# Altium PCB EE_smallOB_BW_v1.0.PcbDoc (part 4 of 4)
Units mil, origin at the board's own origin, x right, y up, seen from the top; angles counter-clockwise.
Board outline 1388 x 1586.96 mil, 4 copper layers (Top Layer, Layer 1, Layer 2, Bottom Layer), stack 37.371 mil thick; 116 components, 102 nets, 640 pads, 211 vias.
Unrouted connection lines stored in the file: 1.
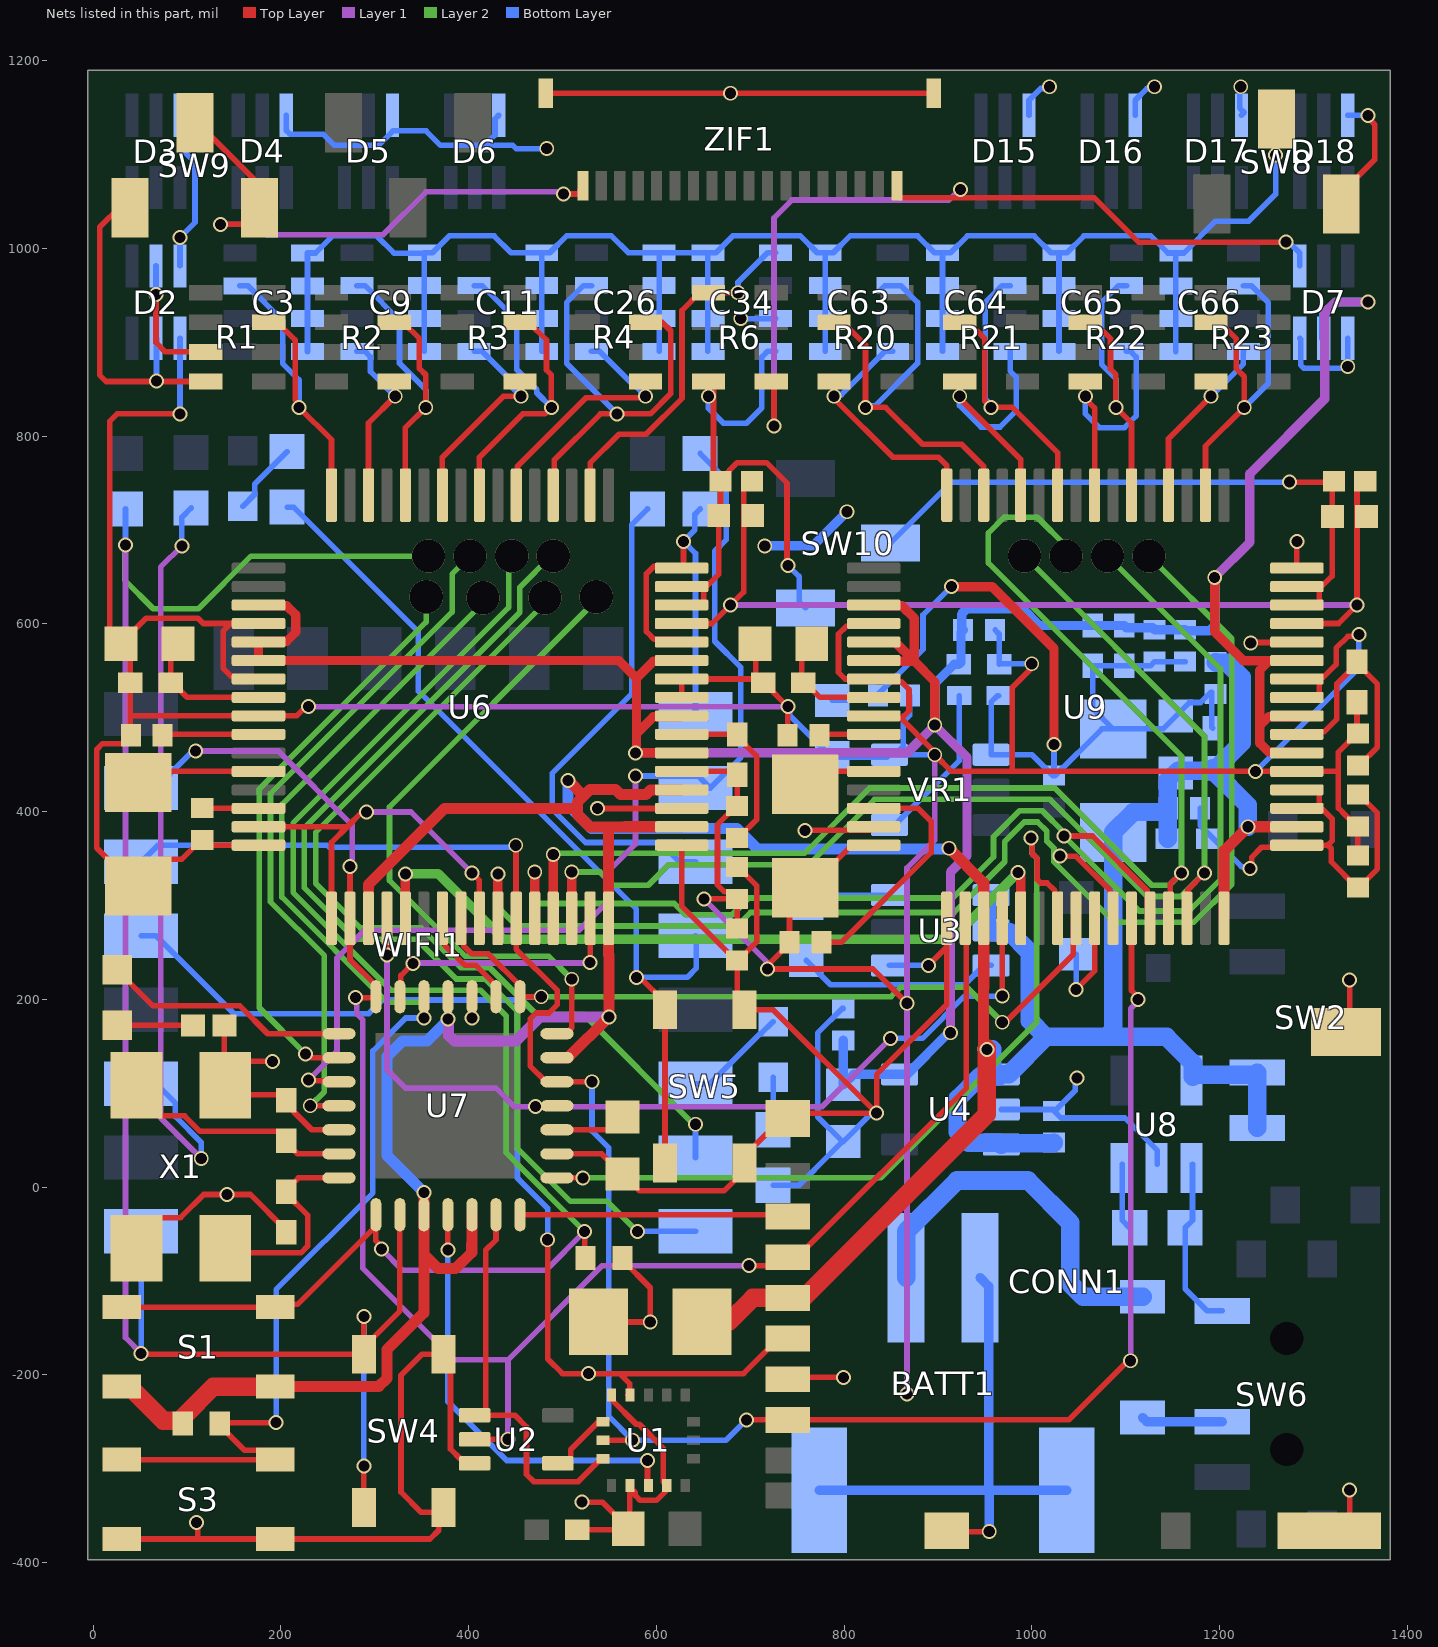
[diagram p4: the nets of this part, all layers, seen from the top]

## Via types
v1: diameter 15.87, hole 11.81, Top Layer to Bottom Layer, 188 vias
v2: diameter 35.43, hole 35.43, Top Layer to Bottom Layer, 14 vias
v3: diameter 19.68, hole 7.87, Top Layer to Bottom Layer, 9 vias

## Nets (pads, with @x,y where several pads share a name; then routed paths per layer and width w, separated by ;. In a path a pad name is that pad's centre, name@x,y a point inside that pad or via, vN(x,y) a via of type N, cw(c..) or ccw(c..) an arc to the next point about the centre after c; other vN are vias at no path point) (continued)
AGND: BATT1.1 BATT1.MP1 BATT1.MP2 C4.2 C8.2 C10.2 C12.2 C14.2 C18.2 C20.1 C21.2 C22.2 C23.1 C24.2 C25.2 C27.2 C28.2 C29.2 C30.1 C32.2 C33.1 C34.7 C35.2 C36.2 C37.2 C38.2 C41.2 C42.2 C43.2 C44.2 C58.2 C60.2 CONN1.6 CONN1.11 CONN1.12 CONN1.13 CONN1.14 D2.3 D3.3 D4.3 D5.3 D6.3 D7.1 D7.3 D15.3 D16.3 D17.3 D18.3 R8.2 R9.1 R14.1 R17.1 S3.3 S3.4 SW4.3 SW4.4 SW5.3 SW5.4 SW8.3 U1.5 U1.10 U1.12 U2.3 U3.1 U4.2 U6.31 U6.33 U6.41 U6.49 U6.51 U6.60 U6.64 U7.5 U7.16 U7.24 U8.2 U9.31 U9.33 U9.41 U9.49 U9.51 U9.52 U9.60 U9.64 VR1.1 WIFI1.15 X1.2 X1.4 ZIF1.MP1 ZIF1.MP2 | length 8393.5
  Top Layer w6: S3.3@30.51,-375 112.2,-375 ; X1.2@46.26,-64.96 46.26,-57.09 70.82,-32.53 93.11,-32.53 117.76,-7.87 v1(142.72,-7.87) 167.51,-7.87 205.71,-46.08 C23.1@205.71,-48.08 ; v1(110.24,-357.28) 111.43,-358.47 111.43,-374.22 112.2,-375 ; R8.2@139.76,172.24 139.76,109.25 X1.4@140.75,108.27 ; U6.31@176.18,383.86 270.67,383.86 ; v1(190.94,133.86) 165.31,133.86 140.75,109.3 X1.4@140.75,108.27 ; U6.33@253.94,286.42 253.94,367.13 270.67,383.86 ; U7.5@261.81,61.02 232.94,61.02 213.71,80.25 213.71,82.37 197.71,98.37 150.65,98.37 X1.4@140.75,108.27 ; v1(291.34,399.61) 286.42,399.61 270.67,383.86 ; v1(403.54,180.12) U7.24@403.54,202.76 ; v1(403.54,334.65) 411.42,326.77 U6.41@411.42,286.42 ; U2.3@406.5,-294.29 401.62,-289.42 391.03,-289.42 380.76,-279.15 380.76,-185.88 SW4.4@373.03,-178.15 350.39,-178.15 327.99,-200.55 327.99,-325.04 349.39,-346.43 368.13,-346.43 368.13,-365.56 358.69,-375 S3.4@193.9,-375 112.2,-375 ; ZIF1.MP1@482.28,1165.35 v1(679.13,1165.35) ZIF1.MP2@895.67,1165.35 ; U7.16@494.09,35.43 541.73,35.43 563.19,13.98 C25.2@563.98,13.98 582.03,-4.08 672.1,-4.08 693.9,17.72 SW5.3@693.9,25.59 693.9,33.46 716.58,56.15 720.52,56.15 743.11,78.74 v1(834.65,78.74) ; C10.2@515.6,-365.16 569.09,-365.16 569.09,-362.4 542.32,-335.63 v1(520.67,-335.63) ; v1(537.4,403.54) 537.68,403.27 626.69,403.27 U6.51@626.97,403.54 U6.51@629.87,400.64 ; C4.2@538.38,-143.7 v1(593.5,-143.7) 593.5,-107.28 563.98,-77.76 R9.1@563.98,-75.79 ; U1.5@552.17,-221.46 552.17,-226.31 578.6,-252.75 581.82,-252.75 607.49,-278.42 607.49,-314.18 U1.12@611.22,-317.91 609.3,-319.83 609.3,-324.69 600.19,-333.8 582.89,-333.8 577.61,-328.53 577.61,-325.65 U1.10@571.85,-319.88 ; C8.2@570.08,-364.17 571.85,-362.4 U1.10@571.85,-319.88 ; U1.10@571.85,-317.91 U1.10@571.85,-319.88 ; U6.60@626.97,580.71 624.06,583.61 597.71,583.61 589.42,591.9 589.42,653.4 597.44,661.42 625,661.42 U6.64@626.97,659.45 628.94,661.42 v1(628.94,687.99) ; U6.49@629.87,367.08 U6.49@626.97,364.17 626.97,299.45 684.84,241.57 C18.2@686.02,241.57 ; C21.2@687.2,340.83 706.83,321.2 706.83,261.2 687.2,241.57 C18.2@686.02,241.57 ; CONN1.11@723.47,56.15 CONN1.11@740.16,72.83 ; CONN1.6@740.16,-204.72 742.13,-202.76 v1(799.21,-202.76) ; v1@753.86,380 v1(758.19,380) 827.84,380 U9.31@831.69,383.86 ; v1(889.76,236.22) 909.45,255.91 ; CONN1.14@909.45,-366.14 910.43,-367.13 v1(954.72,-367.13) ; U9.33@909.45,286.42 909.45,255.91 ; v1(1047.24,210.63) 1066.93,230.31 U9.41@1066.93,286.42 ; v1(1232.28,339.57) 1234.17,341.46 1234.17,351.3 1244.94,362.06 1280.37,362.06 U9.49@1282.48,364.17 1315.38,364.17 ; v1(1233.27,579.72) 1233.76,580.22 1281.99,580.22 U9.60@1282.48,580.71 ; U9.52@1282.48,423.23 1303.17,423.23 1306.08,420.32 1306.08,406.3 1320.02,392.35 1320.02,368.81 1315.38,364.17 ; U9.64@1282.48,659.45 v1(1282.48,687.99) ; CONN1.13@1316.93,-366.14 1321.9,-366.14 1338.58,-349.46 v1(1338.58,-322.83) ; SW8.3@1329.72,1047.24 1329.72,1059.06 1365.36,1094.69 1365.36,1131.97 1358.27,1139.06 v1(1358.27,1141.73) ; CONN1.12@1334.65,165.35 1338.58,169.29 v1(1338.58,220.47) ; C60.2@1347.44,418.03 1348.62,418.03 1368.25,398.4 1368.25,338.96 1348.62,319.33 1346.26,319.33 1318.9,346.69 1318.9,360.66 1315.38,364.17 ; C18.2@686.02,241.57 686.02,196.85 SW5.4@693.9,188.98 724.41,188.98 v1(834.65,78.74) ; v1(834.65,78.74) 834.65,119.75 909.45,194.55 909.45,255.91
  Top Layer w10: v1(914.37,639.76) 957.68,639.76 1023.62,573.82 v1(1023.62,471.46)
  Layer 1 w6: v1(291.34,399.61) 338.58,399.61 v1(403.54,334.65)
  Bottom Layer w6: D2.3@92.52,981.41 v1(92.52,1011.81) 108.52,1027.81 108.52,1091.57 92.52,1107.57 D3.3@92.52,1141.85 ; D4.3@205.71,1141.85 205.71,1125.85 209.71,1121.85 244.99,1121.85 256.99,1109.85 304.04,1109.85 309.31,1115.12 319.47,1125.28 354.75,1125.28 370.18,1109.85 417.22,1109.85 ; D6.3@432.09,1141.85 428.09,1137.85 428.09,1120.71 417.22,1109.85 ; v1(483.27,1106.3) 450.68,1106.3 447.14,1109.85 417.22,1109.85 ; WIFI1.15@641.73,503.94 641.73,675.2 v1(628.94,687.99) 640.91,699.97 640.91,716.7 R17.1@646.65,722.44 ; v1(689.96,925.2) 726.73,925.2 C34.7@726.94,925.41 ; R14.1@724.41,1.97 752.11,1.97 768.01,17.87 768.01,18.01 798.42,48.43 771.9,74.95 771.9,164.11 798.03,190.24 C35.2@799.21,190.24 ; C29.2@787.4,518.5 830.94,518.5 830.94,519.68 884.17,572.91 884.17,609.57 v1(914.37,639.76) ; C37.2@799.21,48.43 829.53,78.74 v1(834.65,78.74) ; U3.1@848.43,236.22 v1(889.76,236.22) ; 952,-322.83 954.72,-325.56 ; C30.1@964.57,523.62 963.69,523.62 956.69,516.62 VR1.1@956.69,460.63 1000.08,460.63 1022.44,438.27 C36.2@1023.62,438.27 ; U4.2@967.52,82.68 1022.2,82.68 C38.2@1023.62,81.26 ; D15.3@997.05,1141.85 997.05,1157.85 1009.61,1170.41 1016.86,1170.41 v1(1018.75,1172.3) ; v1(1023.62,471.46) C36.2@1023.62,438.27 ; v1(1047.24,210.63) C33.1@1047.24,248.03 ; v1(1048.23,116.14) 1046.34,114.25 1046.34,102.8 1024.8,81.26 C38.2@1023.62,81.26 ; D16.3@1110.24,1141.85 1110.24,1157.85 1122.74,1170.35 1129.02,1170.35 v1(1130.91,1172.24) ; U8.2@1133.86,24.21 1133.86,38.98 1099.2,73.63 1031.25,73.63 C38.2@1023.62,81.26 ; C27.2@1163.39,559.76 C22.2@1130.91,559.76 1126.41,555.27 C24.2@1098.43,555.27 C28.2@1064.96,555.27 1064.96,509.84 C44.2@1086.61,488.19 ; C42.2@1179.41,403.54 1179.41,385.43 1223.38,341.46 1230.39,341.46 v1(1232.28,339.57) ; C12.2@1192.91,489.02 1191.93,490 1191.93,527.28 1190.75,527.28 1179.76,516.29 1168.06,516.29 1139.96,488.19 C44.2@1086.61,488.19 ; v1@1221.46,1170.28 1221.46,1149.72 1226.38,1144.8 D17.3@1223.43,1141.85 ; D7.3@1285.43,904.41 1286.42,903.43 1286.42,875.93 1289.93,872.41 1335.01,872.41 v1(1336.61,874.02) D7.1@1336.61,904.41 ; D18.3@1336.61,1141.85 1336.73,1141.73 v1(1358.27,1141.73) ; C36.2@1023.62,438.27 1024.8,438.27 1074.72,488.19 C44.2@1086.61,488.19
  Bottom Layer w10: v1(715.55,683.07) 766.73,683.07 v1(803.15,719.49) ; BATT1.MP2@773.62,-322.83 952,-322.83 BATT1.MP1@1037.4,-322.83 ; BATT1.1@944.88,-96.46 954,-105.57 954,-322.83 ; v1(954.72,-367.13) 954.72,-325.56
  other v1: 1222.64,1172.24
AVDD: C13.1 C17.1 C22.1 C24.1 C27.1 C28.1 C35.1 C37.1 D7.2 U4.5 U6.19 U6.21 U6.22 U6.54 U6.56 U6.59 U9.19 U9.21 U9.22 U9.54 U9.56 U9.59 | length 3181.7
  Top Layer w10: U6.19@176.18,620.08 177.09,619.17 206.27,619.17 215.73,609.71 215.73,591.07 206.26,581.61 177.09,581.61 U6.21@176.18,580.71 U6.22@176.18,561.02 559.97,561.02 578.88,542.11 ; U6.54@626.97,462.6 v1(577.76,462.6) 578.88,463.72 578.88,483.06 ; U6.56@626.97,501.97 626.06,501.06 596.88,501.06 578.88,483.06 ; U6.59@626.97,561.02 626.06,560.12 596.88,560.12 578.88,542.11 ; U9.22@831.69,561.02 832.6,560.12 874.92,560.12 ; U9.21@831.69,580.71 854.33,580.71 874.92,560.12 ; U9.19@831.69,620.08 832.6,619.17 861.78,619.17 874.92,606.03 874.92,560.12 ; v1(896.65,492.13) 896.65,538.38 874.92,560.12 ; v1(1194.88,649.61) 1194.88,591.33 1225.42,560.79 1253.07,560.79 ; U9.54@1282.48,462.6 1281.58,463.5 1252.4,463.5 1242.94,472.96 1242.94,491.6 ; U9.56@1282.48,501.97 1281.58,501.06 1252.4,501.06 1242.94,491.6 ; U9.59@1287.34,560.79 1253.07,560.79 ; 578.88,483.06 578.88,542.11 ; 1242.94,491.6 1242.94,550.66 1253.07,560.79
  Layer 1 w10: v1(577.76,462.6) 867.13,462.6 v1(896.65,492.13) 930.94,457.84 930.94,353.16 913.39,335.6 v1(913.39,164.37) ; v1(1194.88,649.61) 1232.35,687.08 1232.35,759.91 1312.01,839.57 1312.01,931.1 1323.82,942.91 v1(1358.27,942.91)
  Bottom Layer w10: C35.1@799.21,156.22 C37.1@799.21,109.06 810.23,120.08 U4.5@859.25,120.08 867.13,120.08 910.29,163.25 912.26,163.25 v1(913.39,164.37) ; v1(896.65,492.13) 896.65,536.26 917.48,557.09 C13.1@922.4,557.09 924.64,559.33 924.64,591.26 C17.1@926.89,593.5 925.2,595.2 925.2,610.46 931.05,616.31 989.99,616.31 1008.03,598.27 C28.1@1064.96,598.27 C24.1@1098.43,598.27 1100.67,596.03 1128.66,596.03 C22.1@1130.91,593.78 C27.1@1163.39,593.78 1164.38,592.78 1189.02,592.78 1194.88,598.64 v1(1194.88,649.61) ; D7.2@1311.02,904.41 1311.02,930.12 1323.82,942.91 v1(1358.27,942.91)
AVSS: C1.2 C2.2 C5.2 C6.2 C7.2 C13.2 C15.1 C17.2 C18.1 C19.1 C21.1 C29.1 C32.1 C45.2 C46.2 C47.2 C51.1 C54.2 C55.2 C58.1 C59.1 C60.1 D2.4 U6.20 U6.23 U6.25 U6.32 U6.53 U6.57 U6.58 U9.20 U9.23 U9.25 U9.32 U9.53 U9.57 U9.58 VR1.5 | length 5087.5
  Top Layer w6: v1(92.52,823.82) 25.59,823.82 17.51,815.74 17.51,590.95 C1.2@29.72,578.74 ; U6.32@176.18,364.17 121.77,364.17 C7.2@116.14,369.8 114.96,369.8 94.52,349.36 76.72,349.36 C2.2@48.23,320.87 44.29,320.87 3.8,361.36 3.8,466.33 9.96,472.49 32.45,472.49 40.08,480.12 C6.2@40.08,481.3 39.52,481.86 39.52,501.97 ; U6.23@176.18,541.34 173.28,544.24 146.93,544.24 138.64,552.53 138.64,592.31 146.72,600.39 117.25,600.39 111.6,606.05 56.24,606.05 29.72,579.53 C1.2@29.72,578.74 ; v1(229.36,511.84) 226.68,511.84 216.82,501.97 U6.25@176.18,501.97 176.04,502.11 45.42,502.11 45.28,501.97 39.52,501.97 ; U6.58@609.44,541.34 U6.58@624.06,541.34 ; U6.53@626.97,442.91 682.24,442.91 C15.1@686.02,439.13 C19.1@686.02,405.79 684.84,405.79 665.21,386.16 665.21,321.99 672.76,314.44 678.39,314.44 C21.1@685.75,307.09 ; U6.57@626.97,521.65 626.97,538.43 U6.58@624.06,541.34 ; v1(650.59,307.09) C21.1@685.75,307.09 ; C18.1@686.02,275.59 C21.1@686.02,306.81 C21.1@685.75,307.09 ; C46.2@704.92,578.74 705.74,577.93 705.74,545.4 C47.2@709.8,541.34 ; C47.2@717.52,533.62 C47.2@713.74,537.4 C47.2@709.8,541.34 ; C47.2@717.94,534.03 739.88,512.09 C54.2@739.88,481.3 ; U9.32@831.69,364.17 828.79,361.27 805.17,361.27 762.79,318.9 C45.2@758.86,318.9 741.85,301.89 741.85,259.65 720.39,238.19 720.39,234.17 v1(718.5,232.28) 830.71,232.28 v1(867.13,195.87) ; U9.20@831.69,600.39 828.79,597.49 802.44,597.49 794.15,589.2 794.15,548.37 801.18,541.34 U9.23@831.69,541.34 834.6,538.43 860.95,538.43 869.24,530.15 869.24,507.35 860.95,499.06 894.76,465.25 894.76,462.52 v1(896.65,460.63) 914.37,442.91 979.33,442.91 ; v1(1000,557.58) 1000,553.15 979.33,532.48 979.33,442.91 ; U9.57@1282.48,521.65 1303.17,521.65 1306.08,524.56 1306.08,538.58 1324.27,556.78 1324.27,574.15 1336.81,586.69 1346.54,586.69 v1(1348.43,588.58) ; 1333.93,396.35 1346.26,384.02 C60.1@1347.44,384.02 C58.1@1347.44,353.35 ; 1333.93,396.38 1326.63,403.67 1326.63,442.91 ; C51.1@1346.46,516.61 1346.46,483.98 C59.1@1347.44,482.99 1346.26,482.99 1326.63,463.36 1326.63,442.91 ; C1.2@29.72,578.74 39.52,568.94 C5.2@39.52,537.4 39.52,501.97 ; U6.58@624.06,541.34 U6.58@626.97,541.34 C47.2@709.8,541.34 ; 979.33,442.91 U9.53@1282.48,442.91 1326.63,442.91
  Layer 1 w6: v1(229.36,511.84) v1(740.19,511.84) ; v1(650.59,307.09) 718.5,239.17 v1(718.5,232.28) ; v1(867.13,-220.47) v1(867.13,195.87) 867.13,340.08 896.65,369.61 v1(896.65,460.63)
  Bottom Layer w6: v1(92.52,823.82) D2.4@92.52,904.41 ; v1(740.19,511.84) 742.08,509.95 742.08,502.41 786.61,457.87 C29.1@787.4,457.87 845.67,457.87 VR1.5@848.43,460.63 v1(896.65,460.63) ; VR1.5@854.29,460.63 863.1,469.44 863.1,495.83 870.08,502.81 C32.1@870.08,523.62 ; C17.2@960.9,593.5 965.4,589.01 C13.2@965.4,557.09 965.89,557.58 v1(1000,557.58) ; v1(1238.19,442.91) 1348.43,553.15 v1(1348.43,588.58)
BIAS: D7.4 R6.1 ZIF1.18 | length 962.7
  Top Layer w6: R6.1@722.44,858.27 725.39,855.31 v1(725.39,811.02) ; ZIF1.18@856.3,1066.93 856.3,1057.09 859.21,1054.18 924.21,1054.18 ; v1(924.21,1062.99) 924.21,1054.18 ; v1@1264.86,1006.75 1113.81,1006.75 1066.37,1054.18 924.21,1054.18
  Layer 1 w6: v1(725.39,811.02) 725.39,1032.48 744.51,1051.6 911.65,1051.6 923.05,1062.99 v1(924.21,1062.99)
  Bottom Layer w6: v1(1270.67,1006.89) 1273.56,1006.89 1285.43,995.02 D7.4@1285.43,981.41
BIAS_DRV: C16.1 C34.8 R5.1 R6.8 SW10.1 U6.62 U6.63 | length 663.1
  Top Layer w6: U6.62@626.97,620.08 647.66,620.08 650.56,622.98 650.56,637.01 666.34,652.78 C16.1@666.34,721.46 ; R6.8@655.51,858.27 660.88,852.9 660.88,759.4 R5.1@668.31,751.97 ; C16.1@666.54,715.55 668.31,717.32 R5.1@668.31,751.97 ; v1(740.16,662.4) 739.17,663.39 739.17,749.93 717.31,771.8 686.23,771.8 668.31,753.87 R5.1@668.31,751.97
  Bottom Layer w6: v1(655.51,842.52) 655.51,829.72 671.46,813.77 695.99,813.77 712.44,830.22 712.44,884.41 718.44,890.41 C34.8@726.94,890.41 ; v1(740.16,662.4) 752.13,650.43 752.13,623.85 SW10.1@758.86,617.13
BIAS_INV: C16.2 C53.2 R5.2 R25.2 U6.61 U9.61 | length 1077.8
  Top Layer w6: U6.61@626.97,600.39 659.45,600.39 v1(679.13,620.08) 692.96,633.9 692.96,744.14 700.79,751.97 R5.2@701.77,751.97 ; U9.61@1282.48,600.39 1326.77,600.39 v1(1346.46,620.08) v1(1346.46,620.08) 1346.5,744.14 1354.33,751.97 R25.2@1355.31,751.97
  Layer 1 w6: v1(679.13,620.08) v1(1346.46,620.08)
BOOT_EN: R9.2 S1.1 S1.2 U7.8 | length 1617.9
  Top Layer w6: S1.1@30.51,-127.95 S1.2@193.9,-127.95 196.85,-125 217.52,-125 U7.8@301.18,-41.34 ; U7.8@301.18,-29.53 U7.8@301.18,-41.34 ; v1(307.09,-65.94) 307.09,-63.27 301.18,-57.37 U7.8@301.18,-41.34 ; v1(523.62,-47.24) 523.62,-74.8 R9.2@524.61,-75.79
  Layer 1 w6: v1(307.09,-65.94) 329.72,-88.58 482.28,-88.58 v1(523.62,-47.24)
  Layer 2 w6: v2(445.87,672.24) 442.58,668.96 442.58,617.41 213,387.83 213,313.81 317.17,209.65 412.58,209.65 440.1,182.12 440.1,36.28 v1(523.62,-47.24)
CLK: U6.37 U9.37 | length 808
  Top Layer w10: U6.37@332.68,286.42 v1(332.68,333.66) ; v1(985.33,335.1) 985.33,333.51 988.19,330.65 U9.37@988.19,286.42
  Layer 2 w10: v1(332.68,333.66) 367.79,333.66 437.36,264.09 914.32,264.09 v1(985.33,335.1)
CS1: U6.39 U7.23 | length 114.1
  Top Layer w6: U6.39@372.05,286.42 374.95,283.51 374.95,257.16 395.69,236.42 407.28,236.42 429.13,214.57 U7.23@429.13,202.76
CS2: U7.15 U9.39 | length 880.2
  Top Layer w6: U7.15@494.09,9.84 v1(521.65,9.84) ; v1(999.02,372.05) 1000.54,370.53 1000.54,355.11 1005.91,349.74 1005.91,327.48 1009.42,323.96 1016.37,323.96 1024.65,315.67 1024.65,289.32 U9.39@1027.56,286.42
  Layer 2 w6: v1(521.65,9.84) 839.41,9.84 1005.13,175.56 1005.13,350.52 1000.54,355.11 1000.54,370.53 v1(999.02,372.05)
CS3: CONN1.2 U7.14 | length 286.2
  Top Layer w6: U7.14@454.72,-29.53 738.19,-29.53 CONN1.2@740.16,-31.5
CS4: U1.8 U2.1 U7.13 | length 426.1
  Top Layer w6: U2.1@406.5,-243.11 U2.1@413.39,-243.11 ; U7.13@429.13,-29.53 429.13,-56.24 418.26,-67.12 418.26,-238.24 U2.1@413.39,-243.11 ; U1.8@543.31,-289.37 541.34,-289.37 516.73,-313.98 469.49,-313.98 461.61,-306.1 461.61,-255.48 449.24,-243.11 U2.1@413.39,-243.11
D13: R17.2 U7.3 WIFI1.16 | length 1118.1
  Top Layer w6: v1(229.34,114.18) 230.33,113.19 260.82,113.19 U7.3@261.81,112.2
  Layer 1 w6: v1(229.34,114.18) 259.8,144.65 259.8,244.05 289.37,273.62 517.72,273.62 546.79,302.7 546.79,334.52 577.76,365.49 v1(577.78,438.01)
  Bottom Layer w6: v1(577.78,438.01) 644.66,438.01 657.48,425.2 690.1,457.82 690.1,553.63 662.2,581.54 662.2,677.35 674.35,689.51 674.35,753.79 R17.2@646.65,781.5
D18: R12.1 SW4.1 SW4.2 U7.9 WIFI1.1 | length 2080.2
  Top Layer w6: v1(51.18,-177.17) 52.17,-178.15 SW4.2@288.39,-178.15 ; SW4.1@288.39,-341.54 v1(288.39,-297.24) ; v1(288.39,-137.8) SW4.2@288.39,-178.15 ; U7.9@326.77,-29.53 326.77,-131.89 288.39,-170.28 SW4.2@288.39,-178.15
  Layer 1 w6: v1(34.45,684.06) 34.45,-160.43 v1(51.18,-177.17)
  Layer 2 w6: v1(34.45,684.06) 33.46,683.07 33.46,646.65 63.98,616.14 112.2,616.14 168.31,672.24 v2(357.28,672.24)
  Bottom Layer w6: v1(34.45,684.06) R12.1@34.45,722.44 ; v1(51.18,-177.17) WIFI1.1@51.18,-47.24 ; v1(288.39,-297.24) v1(288.39,-137.8)
DRDY: U6.47 U7.27 | length 277.8
  Top Layer w6: U7.27@326.77,202.76 327.88,203.87 327.88,225.52 v1(340.55,238.19) ; v1(529.53,239.17) U6.47@529.53,286.42
  Layer 1 w6: v1(340.55,238.19) 341.04,238.68 529.04,238.68 v1(529.53,239.17)
DRL_SET: C53.1 R25.1 SW10.2 U9.62 U9.63 | length 658.7
  Top Layer w6: v1(1274.61,750.98) R25.1@1320.87,750.98 ; U9.62@1282.48,620.08 1303.17,620.08 1306.08,622.98 1306.08,637.01 1320.02,650.96 1320.02,750.14 R25.1@1320.87,750.98 ; R25.1@1321.85,751.97 R25.1@1320.87,750.98
  Bottom Layer w6: SW10.2@849.41,686.02 914.37,750.98 v1(1274.61,750.98)
DVDD: C4.1 C12.1 C14.1 C38.1 C41.1 C42.1 C43.1 C44.1 CONN1.4 R7.2 S1.3 S1.4 SW2.3 SW2.4 U3.4 U3.5 U4.1 U4.3 U6.35 U6.48 U6.50 U6.52 U7.10 U7.12 U7.20 U7.25 U8.5 U9.35 U9.48 U9.50 | length 4670.7
  Top Layer w11.81: S1.4@193.9,-212.6 304.24,-212.6 313.09,-203.75 313.09,-173.13 352.36,-133.86 352.36,-87.6 U7.10@352.36,-29.53 ; U6.35@293.31,286.42 293.31,322.35 374.5,403.54 516.07,403.54 ; v1(352.36,-5.91) 352.36,-71.85 367.28,-86.77 386.17,-86.77 403.35,-69.59 403.35,-60.95 403.54,-60.76 U7.12@403.54,-29.53 ; U7.20@494.09,137.8 505.91,137.8 v1(549.37,181.26) 549.37,247.39 549.21,247.55 549.21,382.42 547.93,383.7 ; v1(505.91,433.07) 506.38,433.07 522.63,416.83 ; U6.50@626.97,383.86 566.84,383.86 566.68,383.7 547.93,383.7 ; U6.52@626.97,423.23 594.01,423.23 588.95,418.17 561.67,418.17 556.46,423.39 529.18,423.39 522.63,416.83 ; v1(912,361) 948.82,324.18 U9.35@948.82,286.42 948.82,212.12 948.66,211.96 948.66,151.36 v1@952.26,147.75 ; U9.48@1204.72,286.42 1204.72,358.27 v1(1230.32,383.86) U9.50@1282.48,383.86 ; 516.07,403.54 516.07,410.27 522.63,416.83 ; 516.07,403.54 516.07,396.82 529.18,383.7 547.93,383.7
  Top Layer w19.68: S1.3@30.51,-212.6 38.39,-212.6 74.8,-249.01 94.49,-249.01 95.47,-250 R7.2@95.47,-251.97 96.46,-250.98 96.46,-244.33 128.19,-212.6 S1.4@193.9,-212.6 ; C4.1@677.26,-143.7 702.85,-118.11 CONN1.4@740.16,-118.11 756.66,-118.11 952.26,77.5 v1(952.26,146.65) v1@952.26,147.75
  Layer 1 w11.81: v1(377.95,179.13) 378.73,178.36 378.73,161.65 384.87,155.51 450.24,155.51 475.99,181.26 v1(549.37,181.26)
  Bottom Layer w10: U3.5@956.69,273.62 U3.4@956.69,311.02
  Bottom Layer w11.81: v1(352.36,-5.91) 312.9,33.56 312.9,138.93 329.38,155.41 355.72,155.41 377.18,176.87 377.18,178.36 v1(377.95,179.13) ; v1(505.91,433.07) 505.91,406.98 530.9,381.98 686.03,381.98 707.86,360.16 911.16,360.16 v1(912,361)
  Bottom Layer w19.68: v1(952.26,146.65) 957.68,146.65 957.68,122.05 959.65,120.08 U4.1@967.52,120.08 ; U3.5@956.69,273.62 958.66,271.65 976.38,271.65 997.78,250.25 997.78,177.41 1015.25,159.94 ; C38.1@1023.62,47.24 1022.83,46.46 968.7,46.46 U4.3@967.52,45.28 965.55,47.24 932.79,47.24 921.26,58.78 921.26,94.49 944.88,118.11 965.55,118.11 U4.1@967.52,120.08 ; 1079.43,159.94 1086.61,167.12 C44.1@1086.61,377.95 1108.27,399.61 C42.1@1142.64,399.61 ; C41.1@1144.84,371.06 1144.84,397.41 C42.1@1142.64,399.61 ; C43.1@1145.08,433.46 1145.08,402.05 C42.1@1142.64,399.61 ; C43.1@1153.54,441.14 1155.98,443.58 1191.76,443.58 C12.1@1192.91,444.74 ; U8.5@1171.26,117.52 U8.5@1171.26,117.81 ; C14.1@1195.87,559.33 1196.65,558.54 1208.19,558.54 1223.52,543.21 1223.52,473.22 1196.32,446.02 C12.1@1192.91,446.02 C12.1@1192.91,444.74 ; v1(1230.32,383.86) 1230.32,406.62 1192.91,444.02 C12.1@1192.91,444.74 ; SW2.4@1240.16,62.99 SW2.3@1240.16,122.05 1237.89,119.78 1173.23,119.78 U8.5@1171.26,117.81 ; U4.1@967.52,120.08 975.39,120.08 1015.25,159.94 ; 1015.25,159.94 1143.61,159.94 1171.26,132.28 U8.5@1171.26,117.81
GPIO1: U6.42 U9.42 | length 1499.4
  Top Layer w6: v1(1030.07,352.61) 1030.32,352.37 1047.01,352.37 1083.71,315.67 1083.71,289.32 U9.42@1086.61,286.42
  Top Layer w10: U6.42@431.1,286.42 v1(431.1,333.66)
  Layer 2 w6: v1(431.1,333.66) 431.1,298.23 451.24,278.09 685.82,278.09 700.28,292.54 917.22,292.54 971.25,346.58 971.25,368.24 992,388.98 1006.25,388.98 1015.95,379.28 1015.95,368.63 1023.62,360.96 v1@1023.62,352.61 ; v1(1030.07,352.61) v1@1023.62,352.61 ; v2(1125,672.24) 1213.06,584.19 1213.06,322.63 1172.43,282.01 1088.07,282.01 1023.62,346.46 v1@1023.62,352.61
GPIO2: U6.44 U9.44 | length 1472.6
  Top Layer w6: v1(1034.5,374.03) 1064.74,374.02 1123.08,315.67 1123.08,289.32 U9.44@1125.98,286.42
  Top Layer w10: U6.44@470.47,286.42 v1(470.47,335.63)
  Layer 2 w6.06: v1(470.47,335.63) 470.47,306.1 474.39,302.18 619.02,302.18 631.08,290.12 680.84,290.12 698.79,308.07 915.73,308.07 959.22,351.56 959.22,373.22 987.02,401.02 1011.23,401.02 1034.5,377.75 v1(1034.5,374.03) 1114.49,294.04 1167.45,294.04 1201.02,327.62 1201.02,551.93 v2(1080.71,672.24)
GPIO3: U6.45 U9.45 | length 1429.3
  Top Layer w6.06: U9.45@1145.67,286.42 1147.41,288.15 1147.41,322.6 v1(1159.45,334.65)
  Top Layer w10: U6.45@490.16,286.42 v1(490.16,354.33)
  Layer 2 w6.06: v1(490.16,354.33) 491.38,355.55 757.74,355.55 827.33,425.14 1024.45,425.14 1063.53,386.06 1063.53,385.97 1127.87,321.63 1146.43,321.63 v1(1159.45,334.65) 1159.45,459.12 953.74,664.82 953.74,696.85 970.47,713.58 1005.91,713.58 1036.42,683.07 v2(1036.42,672.24)
GPIO4: U6.46 U9.46 | length 1293.5
  Top Layer w6.06: U9.46@1166.26,287.32 1166.26,316.85 v1(1184.06,334.65)
  Top Layer w10: U6.46@509.84,286.42 v1(509.84,335.63) ; U9.46@1165.35,286.42 U9.46@1166.26,287.32
  Layer 2 w6.06: v1(509.84,335.63) 540.16,335.63 554.17,321.61 591.3,321.61 613.17,343.49 762.73,343.49 832.32,413.08 1019.45,413.08 1051.47,381.06 1051.47,380.97 1122.87,309.57 1158.37,309.57 1183.45,334.65 v1(1184.06,334.65) 1184.06,480.32 v2(992.13,672.24)
IN1P: C3.7 R1.7 U6.16 | length 370
  Top Layer w6: R1.7@187.01,921.26 196.36,921.26 215.22,902.4 215.22,838.91 v1@219.49,834.65 ; v1(219.49,830.71) 253.94,796.26 U6.16@253.94,737.2
  Bottom Layer w6: C3.7@156.35,960.2 164.85,960.2 201.85,923.2 201.85,877.47 219.49,859.83 v1@219.49,834.65
IN2P: C9.5 R2.5 U6.14 | length 203.1
  Top Layer w6: U6.14@293.31,737.2 293.31,813.98 v1(321.85,842.52) 321.85,857.28 R2.5@320.87,858.27
  Bottom Layer w6: C9.5@280.93,890.41 289.43,890.41 295.43,884.41 295.43,868.94 v1(321.85,842.52)
IN3P: C9.7 R2.7 U6.12 | length 377.5
  Top Layer w6: R2.7@320.87,921.26 330.22,921.26 347.58,903.89 347.58,872.16 354.33,865.41 v1(354.33,830.71) 332.68,809.06 U6.12@332.68,737.2
  Bottom Layer w6: C9.7@280.93,960.41 289.43,960.41 326.43,923.41 326.43,877.69 354.33,849.79 v1(354.33,830.71)
IN4P: C11.5 R3.5 U6.10 | length 240.6
  Top Layer w6: U6.10@372.05,737.2 372.05,777.56 437.01,842.52 v1(455.71,842.52) 455.71,857.28 R3.5@454.72,858.27
  Bottom Layer w6: C11.5@405.93,890.41 414.43,890.41 443.73,861.11 443.73,854.5 v1(455.71,842.52)
IN5P: C11.7 R3.7 U6.8 | length 417.8
  Top Layer w6: U6.8@411.42,737.2 411.42,777.56 457.68,823.82 481.3,823.82 v1(488.19,830.71) 488.19,865.26 482.94,870.51 482.94,902.4 464.07,921.26 R3.7@454.72,921.26
  Bottom Layer w6: C11.7@405.93,960.41 414.43,960.41 451.43,923.41 451.43,870.75 472.65,849.54 472.65,846.25 v1(488.19,830.71)
IN6P: C26.5 R4.5 U6.6 | length 292
  Top Layer w6: U6.6@450.79,737.2 451.77,738.19 451.77,767.72 524.96,840.9 586.96,840.9 v1(588.58,842.52) R4.5@588.58,858.27
  Bottom Layer w6: C26.5@530.93,890.41 539.43,890.41 575.35,854.5 576.61,854.5 v1(588.58,842.52)
IN7P: C26.7 R4.7 U6.4 | length 463.4
  Top Layer w6: U6.4@490.16,737.2 491.28,738.33 491.28,774.75 540.35,823.82 v1(558.07,823.82) 593.83,823.82 615.3,845.28 615.3,912.26 606.3,921.26 R4.7@588.58,921.26
  Bottom Layer w6: C26.7@530.93,960.41 522.43,960.41 504.43,942.41 504.43,877.69 v1@558.18,823.93
IN8P: C34.5 R6.5 U6.2 | length 385.7
  Top Layer w6: U6.2@529.53,737.2 529.53,771.23 560.31,802.01 589,802.01 627.3,840.31 627.3,933.89 646.16,952.76 R6.5@655.51,952.76 v1(687.01,952.76)
  Bottom Layer w6: v1(687.01,952.76) 687.01,963.98 718.44,995.41 C34.5@726.94,995.41
IN9P: C63.8 R20.8 U9.16 | length 268.6
  Top Layer w6: v1(789.37,842.52) 789.37,840.22 852.03,777.56 900.59,777.56 909.45,768.7 U9.16@909.45,737.2
  Bottom Layer w6: v1@791.26,840.63 v1(789.37,842.52) 791.26,844.41 797.44,844.41 843.44,890.41 C63.8@851.94,890.41
IN10P: C63.6 R20.6 U9.14 | length 482.7
  Top Layer w6: R20.6@789.37,921.26 798.72,921.26 822.83,897.15 v1(822.83,830.71) 844.16,830.71 883.53,791.34 925.2,791.34 948.82,767.72 U9.14@948.82,737.2
  Bottom Layer w6: v1(822.83,830.71) 824.72,832.6 833.36,832.6 878.44,877.69 878.44,942.41 860.44,960.41 C63.6@851.94,960.41 843.44,960.41 C63.6@837.81,954.78
IN11P: C64.8 R21.8 U9.12 | length 300.9
  Top Layer w6: R21.8@923.23,858.27 v1(923.23,842.52) 923.23,840.22 988.19,775.26 U9.12@988.19,737.2
  Bottom Layer w6: v1(923.23,842.52) 923.02,842.32 923.02,832.68 945.88,809.82 966.31,809.82 983.27,826.77 983.27,863.19 976.94,869.51 C64.8@976.94,890.41
IN12P: C64.6 R21.6 U9.10 | length 394.3
  Top Layer w6: R21.6@923.23,921.26 932.58,921.26 949.94,903.89 949.94,837.46 v1(956.69,830.71) 979.33,830.71 1027.56,782.48 U9.10@1027.56,737.2
  Bottom Layer w6: v1(956.69,830.71) 956.69,833.38 950.44,839.63 950.44,942.41 968.44,960.41 C64.6@976.94,960.41
IN13P: C65.8 R22.8 U9.8 | length 284.9
  Top Layer w6: R22.8@1057.09,858.27 v1(1057.09,842.52) 1057.09,839.85 1066.93,830.01 U9.8@1066.93,737.2
  Bottom Layer w6: v1(1057.09,842.52) 1057.09,823.82 1071.85,809.06 1098.85,809.06 1111.22,821.43 1111.22,884.41 1105.22,890.41 C65.8@1100.96,890.41
IN14P: C65.6 R22.6 U9.6 | length 356.9
  Top Layer w6: R22.6@1057.09,921.26 1066.44,921.26 1083.8,903.89 1083.8,871.52 1089.57,865.76 v1@1089.57,835.63 ; v1(1089.57,830.71) 1106.3,813.98 U9.6@1106.3,737.2
  Bottom Layer w6: v1(1089.57,830.71) 1089.57,861.22 1074.46,876.33 1074.46,942.41 1092.46,960.41 C65.6@1100.96,960.41
IN15P: C66.8 R23.8 U9.4 | length 201.8
  Top Layer w6: U9.4@1145.67,737.2 1145.67,797.24 v1(1190.94,842.52) R23.8@1190.94,858.27
  Bottom Layer w6: v1(1190.94,842.52) 1225.39,876.97 1225.39,890.05 C66.8@1225.54,890.2
IN16P: C66.6 R23.6 U9.2 | length 377.4
  Top Layer w6: U9.2@1185.04,737.2 1185.04,789.37 v1(1226.38,830.71) 1226.38,863.44 1217.66,872.16 1217.66,903.89 1200.29,921.26 R23.6@1190.94,921.26
  Bottom Layer w6: C66.6@1225.54,960.2 1234.04,960.2 1252.04,942.2 1252.04,856.38 v1(1226.38,830.71)
IN_SRB1: SW9.2 SW9.3 ZIF1.1 | length 603
  Top Layer w6: SW9.2@121.06,1135.83 121.06,1124.02 137.75,1107.33 189.47,1055.61 SW9.3@189.96,1055.12 ; v1(135.83,1025.59) 160.48,1025.59 177.17,1042.28 SW9.3@177.17,1043.31 ; SW9.3@189.96,1045.28 SW9.3@189.96,1055.12 ; SW9.3@189.96,1057.09 SW9.3@189.96,1055.12 ; v1(500.98,1058.07) 518.75,1058.07 521.65,1060.98 ZIF1.1@521.65,1066.93 ; ZIF1.1@518.75,1061.96 521.65,1064.87 ZIF1.1@521.65,1066.93 ; ZIF1.1@518.75,1075.01 521.65,1072.1 ZIF1.1@521.65,1066.93
  Layer 1 w6: v1(135.83,1025.59) 174.21,1025.59 185.04,1014.76 309.06,1014.76 354.54,1060.24 498.81,1060.24 v1(500.98,1058.07)
INT1: U1.11 U7.11 | length 464.7
  Top Layer w6: v1(377.95,-66.93) U7.11@377.95,-29.53 ; v1(590.55,-291.34) 590.55,-316.93 U1.11@591.54,-317.91
  Bottom Layer w6: v1(377.95,-66.93) 377.95,-228.68 440.61,-291.34 v1(590.55,-291.34)
MCLR: R7.1 S3.1 S3.2 U7.26 | length 1453.1
  Top Layer w6: S3.1@30.51,-290.36 S3.2@193.9,-290.36 184.1,-280.56 161.47,-280.56 134.84,-253.94 R7.1@134.84,-251.97 135.83,-250.98 v1(194.88,-250.98) ; v1(352.36,180.12) U7.26@352.36,202.76
  Layer 2 w6: v1(352.36,180.12) 352.57,180.32 352.57,197.06 312.79,197.06 201,308.84 201,407.69 415.37,622.07 v2(415.37,627.98)
  Bottom Layer w6: v1(194.88,-250.98) 194.88,-109.25 297.99,-6.14 297.99,145.1 333.01,180.12 v1(352.36,180.12)
MISO: CONN1.7 U1.7 U6.43 U7.19 U9.43 WIFI1.6 | length 2228.7
  Top Layer w6: v1(450.2,364.17) 450.49,363.88 450.49,286.71 U6.43@450.79,286.42 450.79,253.28 494.3,209.77 494.3,194.1 485.67,185.47 471.89,185.47 465.55,179.13 465.55,128.94 482.28,112.2 U7.19@494.09,112.2 v1(531.5,112.2) ; U1.7@543.31,-269.69 v1(574.8,-269.69) ; v1(695.87,-248.03) CONN1.7@740.16,-248.03 1039.37,-248.03 1102.36,-185.04 v1(1105.32,-185.04) ; U9.43@1106.3,286.42 1106.3,209.37 1113.19,202.47 v1(1113.19,199.8)
  Layer 1 w6: v1(1105.32,-185.04) 1105.32,189.96 1113.19,197.83 v1(1113.19,199.8)
  Bottom Layer w6: WIFI1.6@51.18,346.46 68.9,364.17 249.67,364.17 251.92,361.92 447.55,361.92 v1@449.8,364.17 ; v1(531.5,112.2) 531.5,59.73 549.21,42.01 549.21,-244.09 v1(574.8,-269.69) 674.21,-269.69 v1(695.87,-248.03)
MOSI: CONN1.3 U2.2 U6.34 U7.28 U9.34 WIFI1.7 | length 1887.5
  Top Layer w6: v1(273.62,341.54) U6.34@273.62,286.42 273.62,242.13 301.18,214.57 U7.28@301.18,202.76 300.2,201.77 v1(279.53,201.77) ; U2.2@406.5,-268.7 v1(441.93,-268.7) ; v1(698.82,-83.66) 731.3,-83.66 CONN1.3@740.16,-74.8 750,-74.8 930.32,105.52 930.32,285.23 U9.34@929.13,286.42
  Layer 1 w6: v1(109.25,464.57) 197.18,464.57 275.87,385.87 275.87,343.79 v1(273.62,341.54) ; v1(279.53,201.77) 280.72,200.58 280.72,184.83 287.4,178.15 287.4,-86.61 384.84,-184.06 441.93,-184.06 ; v1(441.93,-268.7) 441.93,-184.06 ; v1(698.82,-83.66) 542.32,-83.66 441.93,-184.06
  Bottom Layer w6: WIFI1.7@51.18,425.2 66.93,425.2 104.41,462.68 107.36,462.68 v1(109.25,464.57)
NetBATT1_2: BATT1.2 D11.2 | length 418.1
  Bottom Layer w6: D11.2@1114.52,-113.14 D11.2@1118.11,-116.73
  Bottom Layer w20: BATT1.2@866.14,-96.46 866.14,-47.24 920.39,7 996,7 1041,-38 1041,-103 1054.73,-116.73 D11.2@1118.11,-116.73
NetC1_1: C1.1 C5.1 U6.24 | length 152.8
  Top Layer w6: C1.1@95.47,584.65 82.52,571.69 C5.1@82.52,537.4 84.52,537.4 100.26,521.65 U6.24@176.18,521.65
NetC2_1: C2.1 U6.28 | length 132.8
  Top Layer w6: C2.1@48.23,431.1 60.04,442.91 U6.28@176.18,442.91
NetC6_1: C6.1 U6.26 | length 102.5
  Top Layer w6: C6.1@74.09,481.3 75.08,482.28 U6.26@176.18,482.28
NetC7_1: C7.1 U6.30 | length 60.2
  Top Layer w6: C7.1@116.14,403.82 116.42,403.54 U6.30@176.18,403.54
NetC15_2: C15.2 C19.2 U6.55 | length 187.4
  Top Layer w6: U6.55@626.97,482.28 685.87,482.28 685.87,480.28 706.84,459.32 706.84,391.4 687.21,371.77 C19.2@686.02,371.77
NetC20_2: C20.2 U7.6 X1.1 | length 252.7
  Top Layer w6: X1.1@46.26,108.27 46.26,100.39 70.82,75.84 97.46,75.84 113.93,59.37 197.71,59.37 211.68,45.4 211.68,41.4 217.64,35.43 U7.6@261.81,35.43
NetC23_2: C23.2 U7.7 X1.3 | length 231.7
  Top Layer w6: X1.3@140.75,-57.09 X1.3@140.75,-64.96 145.86,-70.08 221.26,-70.08 228.81,-62.52 228.81,-30.18 205.71,-7.08 C23.2@205.71,-5.08 205.71,-3.08 218.63,9.84 U7.7@261.81,9.84
NetC25_1: C25.1 U7.17 | length 75.5
  Top Layer w6: U7.17@494.09,61.02 550.39,61.02 C25.1@563.98,74.61
NetC30_2: C30.2 VR1.4 | length 171.9
  Bottom Layer w6: VR1.4@848.43,385.83 854.29,385.83 863.1,394.64 922.57,454.1 C30.2@922.57,523.62
NetC31_1: C31.1 U3.6 | length 216.2
  Bottom Layer w6: C31.1@759.84,241.34 785.77,215.41 928.01,215.41 948.82,236.22 U3.6@956.69,236.22
NetC31_2: C31.2 U3.3 | length 92.3
  Bottom Layer w6: C31.2@759.84,301.97 768.9,311.02 U3.3@848.43,311.02
NetC45_1: C45.1 U9.28 | length 78.5
  Top Layer w6: C45.1@758.86,429.13 772.64,442.91 U9.28@831.69,442.91
NetC46_1: C46.1 C47.1 U9.24 | length 128
  Top Layer w6: C46.1@765.55,578.74 754.92,568.11 754.92,539.22 C47.1@756.74,537.4 758.74,537.4 774.48,521.65 U9.24@831.69,521.65
NetC51_2: C51.2 C59.2 U9.55 | length 247.8
  Top Layer w6: U9.55@1282.48,482.28 1285.39,485.19 1311.74,485.19 1325.1,498.55 1325.1,536.25 C51.2@1346.46,557.61 ; C51.2@1345.32,560.75 C51.2@1346.46,559.61 C51.2@1346.46,557.61 ; C59.2@1347.44,448.98 1348.62,448.98 1368.25,468.61 1368.25,535.82 C51.2@1346.46,557.61
NetC54_1: C54.1 U9.26 | length 58.2
  Top Layer w6: C54.1@773.9,481.3 774.88,482.28 U9.26@831.69,482.28
NetC55_1: C55.1 U9.30 | length 256.6
  Top Layer w6: C55.1@775.87,260.83 797.24,260.83 892.72,356.3 892.72,389.76 878.94,403.54 U9.30@831.69,403.54
NetD1_2: D1.2 R8.1 | length 80.7
  Top Layer w6: D1.2@25.59,172.24 R8.1@106.3,172.24
NetD12_1: D12.1 WIFI1.20 | length 110
  Bottom Layer w6: WIFI1.20@641.73,110.24 657.48,110.24 710.68,163.43 711.66,163.43 D12.1@724.41,176.18
NetD12_2: D12.2 R14.2 | length 56.1
  Bottom Layer w6: R14.2@724.41,61.02 D12.2@724.41,117.13
NetD13_2: D13.2 R15.2 | length 77.6
  Bottom Layer w6: D13.2@159.45,725.39 172.2,738.14 172.2,748.97 R15.2@206.69,783.46
NetR13_1: R13.1 U8.3 | length 70.8
  Bottom Layer w6: U8.3@1096.46,24.21 1096.46,-35.43 R13.1@1104.33,-43.31
NetR13_2: R13.2 SW6.1 U8.1 | length 184.9
  Bottom Layer w6: U8.1@1171.26,24.21 1171.26,-35.43 R13.2@1163.39,-43.31 1163.39,-108.27 1187.01,-131.89 SW6.1@1202.76,-131.89
NetR15_1: R15.1 SW5.1 SW5.2 WIFI1.18 | length 974.8
  Top Layer w6: v1(578.74,223.43) 582.68,223.43 609.25,196.85 SW5.2@609.25,188.98 SW5.1@609.25,25.59
  Bottom Layer w6: R15.1@206.69,724.41 213.51,724.41 346.46,591.47 346.46,528.38 578.74,296.09 v1(578.74,223.43) 632.87,223.43 642.72,233.27 642.72,266.73 WIFI1.18@641.73,267.72
NetR16_1: R16.1 WIFI1.3 | length 839.8
  Layer 1 w6: v1(94.49,683.07) 71.85,660.43 71.85,73.82 v1(115.16,30.51)
  Bottom Layer w6: WIFI1.3@51.18,110.24 66.93,110.24 87.55,89.61 87.55,75.2 115.16,47.6 v1(115.16,30.51) ; v1(94.49,683.07) 94.49,713.58 R16.1@104.33,723.43
NetR18_1: R18.1 WIFI1.17 | length 537.8
  Bottom Layer w6: R18.1@590.55,722.44 573.96,705.85 573.96,525.8 488.97,440.81 488.97,402.84 524.73,367.08 604.38,367.08 625,346.46 WIFI1.17@641.73,346.46
NetU1_6: U1.6 U2.4 | length 72.3
  Top Layer w6: U2.4@495.08,-294.29 503.94,-294.29 508.81,-289.42 508.81,-279.64 538.45,-250 U1.6@543.31,-250
OB_LED: D1.1 U7.1 | length 264.4
  Top Layer w6: D1.1@25.59,231.3 63.84,193.05 156.29,193.05 185.96,163.39 U7.1@261.81,163.39
PGC: U7.2 | length 618.4
  Top Layer w6: v1(226.38,141.73) 229.05,141.73 232.99,137.8 U7.2@261.81,137.8
  Layer 2 w6: v1(226.38,141.73) 177,191.11 177,424.29 354.76,602.04 v2(354.76,628.94)
RAW: D11.1 SW6.2 | length 86.5
  Bottom Layer w10: D11.1@1118.11,-245.47 1122.64,-250 SW6.2@1202.76,-250
RESET: U6.36 U7.18 U9.36 | length 987.9
  Top Layer w6: v1(312.99,247.05) U6.36@312.99,286.42 ; v1(471.46,85.63) 471.95,86.12 493.6,86.12 U7.18@494.09,86.61 ; v1(968.5,203.74) U9.36@968.5,286.42
  Layer 1 w6: v1(312.99,247.05) 312.99,124.93 332.46,105.46 429.06,105.46 448.89,85.63 v1(471.46,85.63) 776.57,85.63 v1(849.41,158.46)
  Bottom Layer w6: v1(849.41,158.46) 883.53,158.46 928.47,203.41 968.17,203.41 v1(968.5,203.74)
RXD: U7.21 | length 701.4
  Top Layer w6: U7.21@494.09,163.39 503.61,163.39 509.84,169.61 v1(509.84,221.46)
  Layer 2 w6: v1(509.84,221.46) 485.24,246.06 396.32,246.06 315.74,326.65 315.74,404.98 535.99,625.23 v2(535.99,628.94)
SCLK: CONN1.5 U1.4 U6.40 U7.22 U9.40 WIFI1.5 | length 1968.6
  Top Layer w6: U6.40@391.73,286.42 394.64,283.51 394.64,257.16 403.38,248.42 420.87,248.42 454.72,214.57 U7.22@454.72,202.76 v1(477.36,202.76) ; v1(484.25,-56.1) 484.25,-183.07 500,-198.82 v1(527.56,-198.82) 561.02,-198.82 ; U1.4@571.85,-221.46 571.85,-209.65 561.02,-198.82 ; CONN1.5@740.16,-161.42 730.31,-161.42 692.91,-198.82 561.02,-198.82 ; v1@972.44,175.2 972.44,176.18 1044.34,248.08 1044.34,283.51 U9.40@1047.24,286.42
  Top Layer w10: U1.4@571.77,-221.38 U1.4@571.85,-221.46
  Layer 2 w6: v1(477.36,202.76) 850.19,202.76 850.19,202.88 860.11,212.8 931.29,212.8 v1(968.5,175.59) 968.9,175.2 v1@972.44,175.2
  Bottom Layer w6: WIFI1.5@51.18,267.72 66.93,267.72 149.81,184.83 293.59,184.83 307.99,199.24 451.77,199.24 ; v1(477.36,202.76) 455.29,202.76 451.77,199.24 ; v1(484.25,-56.1) 484.25,-22.64 451.77,9.84 451.77,199.24
SET1: C3.1 C3.2 C3.3 C3.4 C9.1 C9.2 C9.3 C9.4 C11.1 C11.2 C11.3 C11.4 C26.1 C26.2 C26.3 C26.4 C34.1 C34.2 C34.3 C34.4 C63.1 C63.2 C63.3 C63.4 C64.1 C64.2 C64.3 C64.4 C65.1 C65.2 C65.3 C65.4 C66.1 C66.2 C66.3 C66.4 SW8.2 | length 2187.7
  Top Layer w6: v1(1259.84,1099.41) 1259.84,1136.81 SW8.2@1260.83,1137.8
  Bottom Layer w6: C3.4@228.35,890.2 C3.3@228.35,925.2 C3.2@228.35,960.2 C3.1@228.35,995.2 236.85,995.2 255.06,1013.41 302.16,1013.41 320.49,995.08 352.59,995.08 C9.1@352.93,995.41 ; C9.4@352.93,890.41 C9.3@352.93,925.41 C9.2@352.93,960.41 C9.1@352.93,995.41 ; C11.4@477.93,890.41 C11.3@477.93,925.41 C11.2@477.93,960.41 C11.1@477.93,995.41 ; C26.4@602.93,890.41 C26.3@602.93,925.41 C26.2@602.93,960.41 C26.1@602.93,995.41 ; C34.1@654.94,890.41 C34.2@654.94,925.41 C34.3@654.94,960.41 C34.4@654.94,995.41 ; C63.1@779.94,890.41 C63.2@779.94,925.41 C63.3@779.94,960.41 C63.4@779.94,995.41 ; C64.1@904.94,890.41 C64.2@904.94,925.41 C64.3@904.94,960.41 C64.4@904.94,995.41 ; C65.1@1028.96,890.41 C65.2@1028.96,925.41 C65.3@1028.96,960.41 C65.4@1028.96,995.41 ; C66.1@1153.54,890.2 C66.2@1153.54,925.2 C66.3@1153.54,960.2 C66.4@1153.54,995.2 ; v1(1259.84,1099.41) 1259.84,1057.74 1231.18,1029.08 1195.93,1029.08 1162.04,995.2 C66.4@1153.54,995.2 ; C9.1@352.93,995.41 361.43,995.41 379.43,1013.41 427.16,1013.41 445.16,995.41 C11.1@477.93,995.41 ; C11.1@477.93,995.41 486.43,995.41 504.43,1013.41 552.16,1013.41 570.16,995.41 C26.1@602.93,995.41 ; C26.1@602.93,995.41 C34.4@654.94,995.41 ; C34.4@654.94,995.41 663.44,995.41 681.44,1013.41 753.44,1013.41 771.44,995.41 C63.4@779.94,995.41 ; C63.4@779.94,995.41 788.44,995.41 806.44,1013.41 878.44,1013.41 896.44,995.41 C64.4@904.94,995.41 ; C64.4@904.94,995.41 913.44,995.41 931.44,1013.41 1002.46,1013.41 1020.46,995.41 C65.4@1028.96,995.41 ; C65.4@1028.96,995.41 1037.46,995.41 1055.46,1013.41 1126.83,1013.41 1145.04,995.2 C66.4@1153.54,995.2
SRB1: D2.5 R1.4 SW9.1 | length 374.7
  Top Layer w6: SW9.1@52.17,1045.28 29.53,1045.28 6.89,1022.64 6.89,865.16 13.78,858.27 v1@67.91,858.27 ; v1(67.42,858.76) v1@67.91,858.27 ; R1.4@120.08,858.27 110.73,858.27 v1@67.91,858.27
  Bottom Layer w6: D2.5@66.93,904.41 67.42,903.92 v1(67.42,858.76)
SRB2: D2.2 R1.3 | length 139
  Top Layer w6: v1(66.93,950.79) 66.93,899.61 76.77,889.76 R1.3@120.08,889.76
  Bottom Layer w6: v1(66.93,950.79) D2.2@66.93,981.41
TXD: U7.4 | length 734.1
  Top Layer w6: v1(231.3,86.61) U7.4@261.81,86.61
  Layer 2 w6: v1(231.3,86.61) 246.28,101.59 246.28,246.59 189,303.87 189,419.31 382.38,612.7 382.38,653.05 v2(401.57,672.24)
wiRXD: WIFI1.21 | length 951.9
  Layer 2 w6: v2(481.3,627.95) 481.3,622.18 237,377.88 237,323.75 284.77,275.98 349.43,275.98 391.77,233.65 422.52,233.65 472.11,184.06 522.62,184.06 639.75,66.93 v1(641.73,66.93)
  Bottom Layer w6: WIFI1.21@641.73,31.5 v1(641.73,66.93)
wiTXD: WIFI1.22 | length 1118.4
  Layer 2 w6: v2(490.16,672.24) 487.81,672.24 454.58,639.02 454.58,612.44 225,382.86 225,318.78 279.8,263.98 344.46,263.98 386.8,221.65 417.55,221.65 452.1,187.09 452.1,41.25 508.58,-15.24 547.72,-15.24 v1(579.72,-47.24)
  Bottom Layer w6: v1(579.72,-47.24) WIFI1.22@641.73,-47.24
pads on no net: C3.8 C9.6 C9.8 C11.6 C11.8 C26.6 C26.8 C34.6 C63.5 C63.7 C64.5 C64.7 C65.5 C65.7 C66.5 C66.7 CONN1.1 CONN1.8 CONN1.9 CONN1.10 D2.6 D3.2 D3.4 D3.6 D4.2 D4.4 D4.6 D5.2 D5.4 D5.6 D6.1 D6.2 D6.4 D6.6 D7.5 D7.6 D15.2 D15.5 D15.6 D16.2 D16.5 D16.6 D17.2 D17.5 D17.6 D18.2 D18.5 D18.6 R1.1 R1.8 R2.1 R2.3 R2.6 R2.8 R3.1 R3.3 R3.6 R3.8 R4.1 R4.3 R4.6 R4.8 R6.2 R6.3 R6.6 R6.7 R20.2 R20.4 R20.5 R20.7 R21.2 R21.4 R21.5 R21.7 R22.2 R22.4 R22.5 R22.7 R23.2 R23.4 R23.5 R23.7 SW2.0 SW6.3 SW6.MH1 SW6.MH2 SW6.MP1 SW6.MP2 SW6.MP3 SW6.MP4 SW10.3 SW11.3 U1.2 U1.3 U1.9 U1.13 U1.15 U1.16 U4.4 U6.1 U6.3 U6.5 U6.7 U6.9 U6.11 U6.13 U6.15 U6.27 U6.29 U6.38 U7.29 U8.4 U9.1 U9.3 U9.5 U9.7 U9.9 U9.11 U9.13 U9.15 U9.27 U9.29 U9.38 U9.47 WIFI1.2 WIFI1.4 WIFI1.9 WIFI1.10 WIFI1.11 WIFI1.12 WIFI1.13 WIFI1.14 WIFI1.19
copper on no net: | length 8.9
  Top Layer w6: 120.08,952.76 129,952.76
  other v2: 1310.16,81.1 1310.16,277.95
  other v3: 334.65,43.31 377.95,43.31 421.26,43.31 334.65,86.61 377.95,86.61 421.26,86.61 334.65,129.92 377.95,129.92 421.26,129.92

## Polygon pours and split planes (outlines as drawn)
no net on Top Solder (solid): 7.87,601.38 112.2,601.38 112.2,516.73 7.87,516.73
BIAS on Bottom Layer "Bottom Layer-BIAS" (solid, remove dead copper, pour order 12): 623.03,-609.25
AGND on Bottom Layer "Bottom Layer-AGND" (none, remove dead copper, pour order 8): 3.94,1177.17
AGND on Bottom Layer "Bottom Layer-AGND 1" (none, remove dead copper, pour order 6): 3.94,1177.17
AGND on Layer 2 "Layer 2-AGND" (solid, pour order 2): 1374.02,1177.17 1263.78,1177.17 3.94,1177.17 3.94,-389.76 1374.02,-389.76

## Keep-outs
Keep-Out Layer:
  lines w1: -6,-397 -6,1189 ; -6,-396.65 1380.91,-396.65 1380.91,1189.96 1361.22,1189.96 -6,1189.96 ; -6,449 -6,482 -3,485

## Silkscreen, mask and mechanical layers (free items; w line width, h text height)
Bottom Overlay:
  lines w10: 1085.63,-211.81 1118.11,-150.39 1150.59,-211.81
  text "wiEEG UCSD ISN A. Paul 2019" at 828.74,775.59 h20
  text "BOOT_EN" at 385.83,740.16 h20
  text "GPIO4..1" at 997.05,708.66 h20
  text "wiTXD" at 467.52,705.71 h20
  text "TXD" at 373.03,704.72 h20
  text "D18" at 270.67,663.39 h20
  text "PGC" at 269.68,618.11 h20
  text "RXD" at 525.59,575.79 h20
  text "MCLR" at 382.87,572.83 h20
  text "wiRXD" at 438.98,533.46 h20

## Text inside footprints (layer, text, board x,y; h text height)
C3: Mechanical 13 "*" at 230.35,974.2 h50; Bottom Overlay "*" at 243.85,989.2 h50
C9: Mechanical 13 "*" at 354.93,974.41 h50; Bottom Overlay "*" at 368.43,989.41 h50
C11: Mechanical 13 "*" at 479.93,974.41 h50; Bottom Overlay "*" at 493.43,989.41 h50
C26: Mechanical 13 "*" at 604.93,974.41 h50; Bottom Overlay "*" at 618.43,989.41 h50
C34: Mechanical 13 "*" at 652.94,911.41 h50 r180; Bottom Overlay "*" at 639.44,896.41 h50 r180
C63: Mechanical 13 "*" at 777.94,911.41 h50 r180; Bottom Overlay "*" at 764.44,896.41 h50 r180
C64: Mechanical 13 "*" at 902.94,911.41 h50 r180; Bottom Overlay "*" at 889.44,896.41 h50 r180
C65: Mechanical 13 "*" at 1026.96,911.41 h50 r180; Bottom Overlay "*" at 1013.46,896.41 h50 r180
C66: Mechanical 13 "*" at 1151.54,911.2 h50 r180; Bottom Overlay "*" at 1138.04,896.2 h50 r180
D2: Mechanical 13 "*" at 77.43,968.41 h50 r90; Bottom Overlay "*" at 32.34,1003.91 h50 r90
D3: Mechanical 13 "*" at 77.43,1128.85 h50 r90; Bottom Overlay "*" at 32.34,1164.35 h50 r90
D4: Mechanical 13 "*" at 190.62,1128.85 h50 r90; Bottom Overlay "*" at 145.53,1164.35 h50 r90
D5: Mechanical 13 "*" at 303.81,1128.85 h50 r90; Bottom Overlay "*" at 258.72,1164.35 h50 r90
D6: Mechanical 13 "*" at 417,1128.85 h50 r90; Bottom Overlay "*" at 371.91,1164.35 h50 r90
D7: Mechanical 13 "*" at 1300.52,917.41 h50 r270; Bottom Overlay "*" at 1345.61,881.91 h50 r270
D15: Mechanical 13 "*" at 981.96,1128.85 h50 r90; Bottom Overlay "*" at 936.87,1164.35 h50 r90
D16: Mechanical 13 "*" at 1095.15,1128.85 h50 r90; Bottom Overlay "*" at 1050.06,1164.35 h50 r90
D17: Mechanical 13 "*" at 1208.33,1128.85 h50 r90; Bottom Overlay "*" at 1163.24,1164.35 h50 r90
D18: Mechanical 13 "*" at 1321.52,1128.85 h50 r90; Bottom Overlay "*" at 1276.43,1164.35 h50 r90